# EAGLE board StellarisWF121 (EAGLE 6.4)
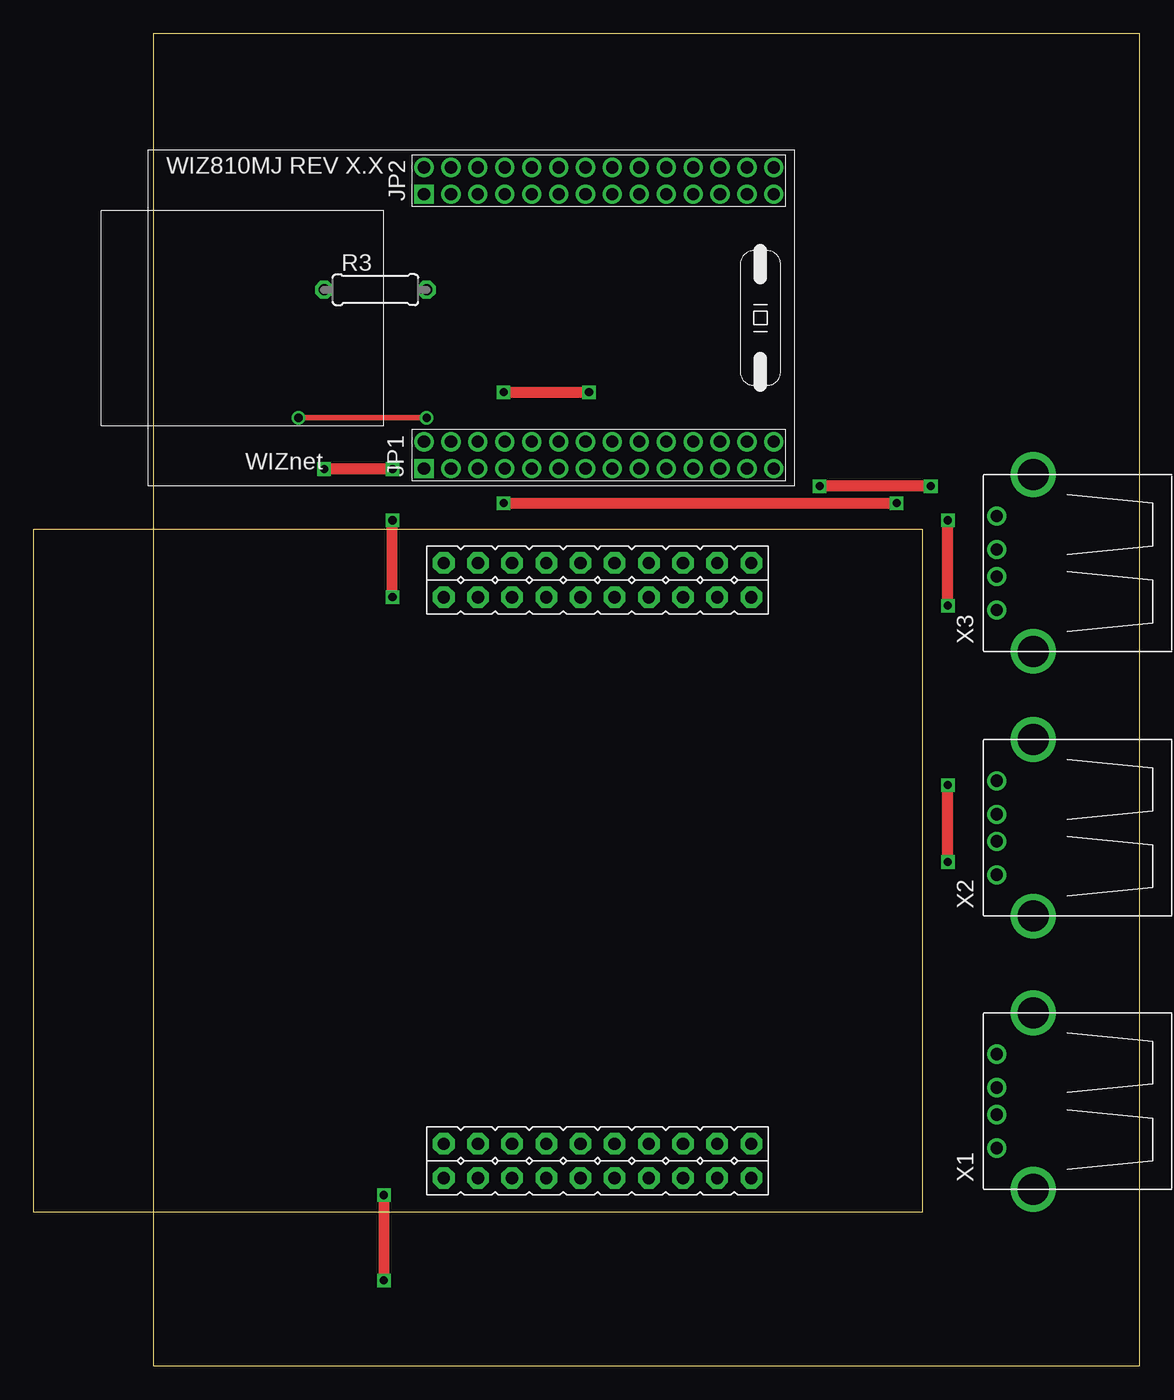
[diagram p0: board, top side]
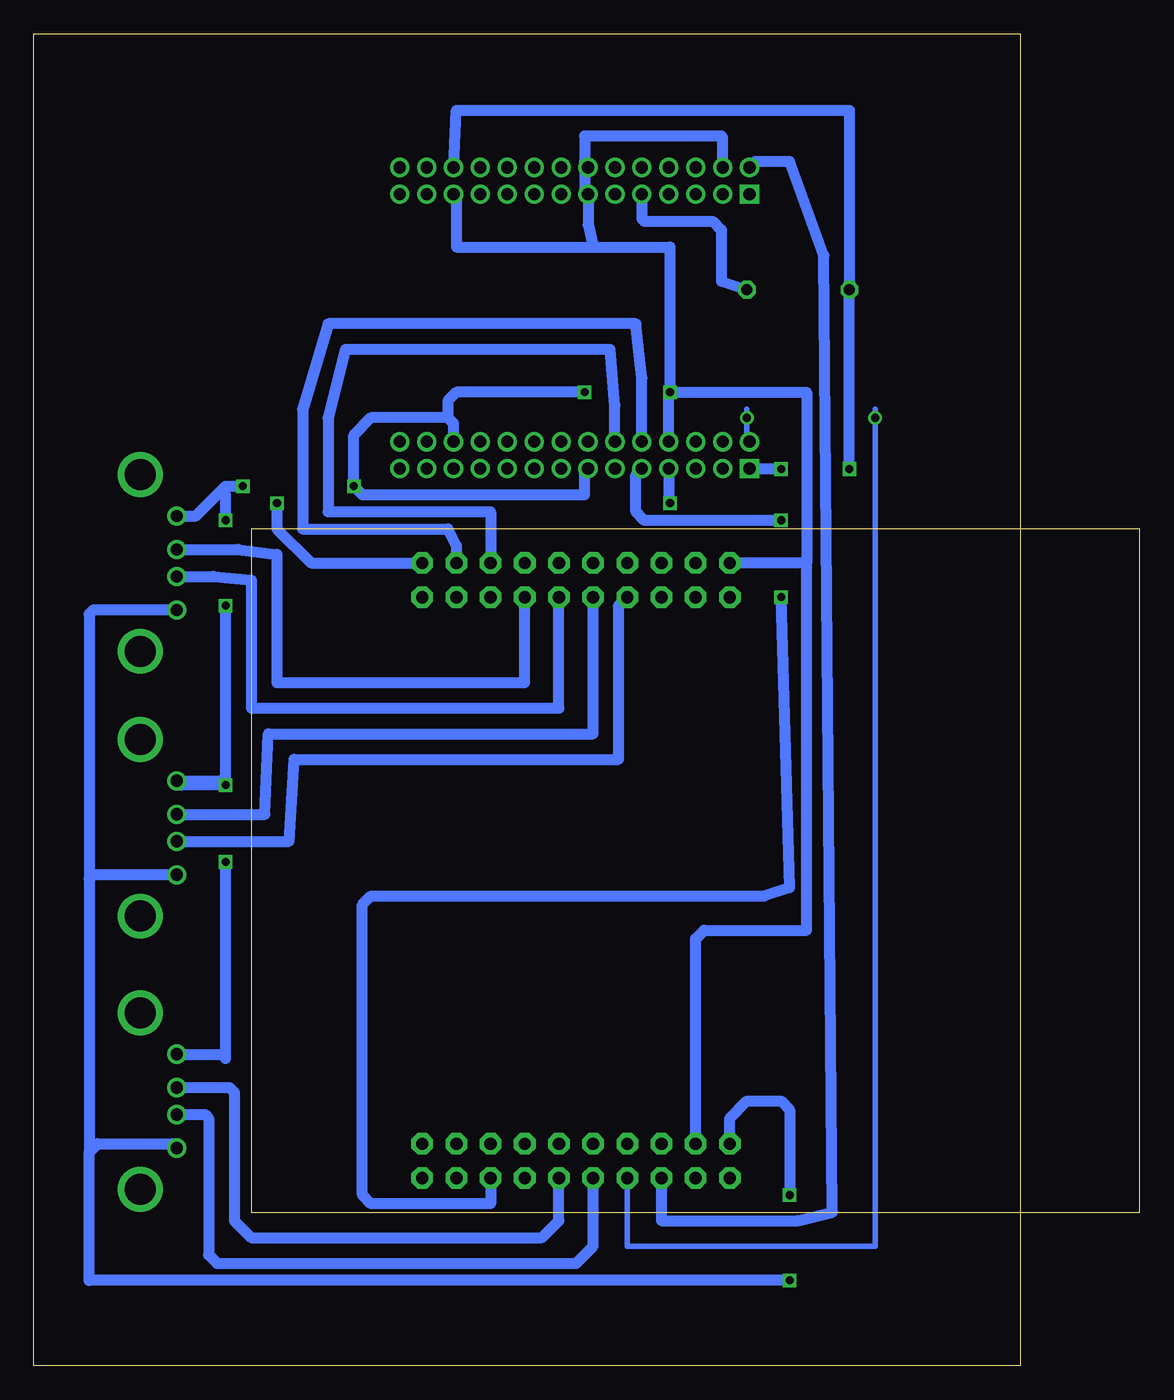
[diagram p1: board, bottom side, seen from below]

Size 73.33 x 99.05 mm. Coordinates in mm from the lower left corner, seen from the top.
Outline: 0,0 73.33,0 73.33,99.05 0,99.05 0,0
Copper layers (1*16): Top 0.035mm / dielectric 1.5mm / Bottom 0.035mm
Design rules "default": minimum track width 10mil, minimum drill 24mil, track to track 8mil, track to pad 8mil, pad to pad 8mil, via to via 8mil, smd to smd 8mil, copper to edge 40mil, drill to drill 8mil, minimum pad ring 10mil, minimum via ring 8mil, stop-mask expansion 4mil, vias tented up to drill 0mil, thermal gap 10mil

## Footprints (pad centres in the part's own frame; a part is rotated, then mirrored left to right if it is on the bottom)
0207/7 = drill 0.813 octagon: 1 -3.81,0; 2 3.81,0
LAUNCHPAD-XL = drill 0.914 pad 1.6 octagon: 3.3V 30.48,2.54; GND1 33.02,5.08; GND2 30.48,48.26; PA2 53.34,48.26; PA3 50.8,48.26; PA4 48.26,48.26; PA5 48.26,2.54; PA6 50.8,2.54; PA7 53.34,2.54; PB0 35.56,2.54; PB1 38.1,2.54; PB2 33.02,48.26; PB3 35.56,45.72; PB4 45.72,2.54; PB5 33.02,2.54; PB6 45.72,48.26; PB7 43.18,48.26; PC4 38.1,45.72; PC5 40.64,45.72; PC6 43.18,45.72; PC7 45.72,45.72; PD0 35.56,5.08; PD1 38.1,5.08; PD2 40.64,5.08; PD3 43.18,5.08; PD6 48.26,45.72; PD7 50.8,45.72; PE0 35.56,48.26; PE1 45.72,5.08; PE2 48.26,5.08; PE3 50.8,5.08; PE4 40.64,2.54; PE5 43.18,2.54; PF0 38.1,48.26; PF1 53.34,5.08; PF2 30.48,45.72; PF3 33.02,45.72; PF4 53.34,45.72; RST 40.64,48.26; VBUS 30.48,5.08
WIZ810MJ = drill 0.9 pad 1.422 square: 1 27.5,-1.3; 29 27.5,-21.7 | drill 0.9 pad 1.422: 2 27.5,-3.3; 3 25.5,-1.3; 4 25.5,-3.3; 5 23.5,-1.3; 6 23.5,-3.3; 7 21.5,-1.3; 8 21.5,-3.3; 9 19.5,-1.3; 10 19.5,-3.3; 11 17.5,-1.3; 12 17.5,-3.3; 13 15.5,-1.3; 14 15.5,-3.3; 15 13.5,-1.3; 16 13.5,-3.3; 17 11.5,-1.3; 18 11.5,-3.3; 19 9.5,-1.3; 20 9.5,-3.3; 21 7.5,-1.3; 22 7.5,-3.3; 23 5.5,-1.3; 24 5.5,-3.3; 25 3.5,-1.3; 26 3.5,-3.3; 27 1.5,-1.3; 28 1.5,-3.3; 30 27.5,-23.7; 31 25.5,-21.7; 32 25.5,-23.7; 33 23.5,-21.7; 34 23.5,-23.7; 35 21.5,-21.7; 36 21.5,-23.7; 37 19.5,-21.7; 38 19.5,-23.7; 39 17.5,-21.7; 40 17.5,-23.7; 41 15.5,-21.7; 42 15.5,-23.7; 43 13.5,-21.7; 44 13.5,-23.7; 45 11.5,-21.7; 46 11.5,-23.7; 47 9.5,-21.7; 48 9.5,-23.7; 49 7.5,-21.7; 50 7.5,-23.7; 51 5.5,-21.7; 52 5.5,-23.7; 53 3.5,-21.7; 54 3.5,-23.7; 55 1.5,-21.7; 56 1.5,-23.7
USB-A-H = drill 0.914: D+ 2.718,-1.003; D- 2.718,1.003; GND 2.718,-3.493; VBUS 2.718,3.493 | drill 2.311: P$5 0,-6.566; P$6 0,6.566

## Placement (x,y rotation side)
R3  [0207/7]  16.51,80.01 0 top
U$1  STELLARIS-LAUNCHPADSTELLARIS-LAUNCHPAD-XL  [LAUNCHPAD-XL]  -8.89,11.43 0 top
U$2  WIZ810MJ  [WIZ810MJ]  47.62,65.41 180 top
X1  [USB-A-H]  65.41,19.69 180 top
X2  [USB-A-H]  65.41,40.01 180 top
X3  [USB-A-H]  65.41,59.69 180 top

## Library data of the parts
R3 = rcl
U$1 X1-X3 = lieven
U$2 = WIZNET

## Nets
3.3V: U$1.3.3V
+5V: U$1.VBUS X1.VBUS X2.VBUS X3.VBUS
GND: U$1.GND1 U$1.GND2 U$2.8 U$2.13 U$2.24 U$2.32 U$2.41 U$2.42 U$2.51 X1.GND X2.GND X3.GND
N$1: U$1.PB0 U$2.30
N$2: U$1.PE5 X1.D+
N$3: U$1.PA2 U$2.7
N$4: U$1.PE4 X1.D-
N$5: U$1.PB1 U$2.2
N$6: U$1.PA5 U$2.9
N$8: U$1.PA4 U$2.12
N$9: U$1.PA3 U$2.10
N$10: R3.2 U$2.37
N$11: U$1.PC4 X2.D-
N$12: U$1.PC5 X2.D+
N$13: U$1.PC6 X3.D-
N$14: U$1.PC7 X3.D+
RST: U$1.RST
VCC: R3.1 U$2.1 U$2.52

## Tracks (layer width: path | path; a pad name or v marks a point on that pad's centre or on a via)
+5V  (via drill 0.6)
  Top 0.813: v17.14,12.7 v17.14,6.35
  Bottom 0.813: U$1.VBUS 21.59,18.41 20.32,19.69 17.78,19.69 17.14,19.05 v17.14,12.7 | v17.14,6.35 69.22,6.35 69.22,15.88 | 69.22,15.88 68.58,16.51 63,16.51 X1.VBUS | X2.VBUS 68.9,36.51 69.22,36.2 | 69.22,36.2 69.22,15.88 | X3.VBUS 68.9,56.2 69.22,55.88 69.22,36.2
GND  (via drill 0.6)
  Top 0.813: v26.04,72.39 v32.39,72.39 | v57.78,65.41 v49.53,65.41 | v59.05,37.47 v59.05,43.18 | v59.05,56.52 v59.05,62.87
  Bottom 0.813: U$2.24 42.12,70.06 42.55,70.48 | 42.55,70.48 48.26,70.48 49.53,69.22 v49.53,65.41 48.89,64.77 32.39,64.77 32.39,66.44 U$2.13 | v26.04,72.39 15.88,72.39 15.88,59.69 | 15.88,59.69 U$1.GND2 | 31.75,83.19 32.12,84.83 U$2.41 32.39,87.36 32.39,89.53 32.12,89.27 U$2.42 32.39,89.36 32.39,91.44 22.23,91.44 22.12,91.34 U$2.32 | 31.75,83.19 26.04,83.19 v26.04,72.39 | U$2.51 42.02,87.1 41.91,86.99 41.91,83.19 31.75,83.19 | U$2.8 26.12,72.3 v26.04,72.39 | v32.39,72.39 41.91,72.39 42.55,71.75 42.55,70.48 | X3.GND 61.28,63.18 59.37,65.09 | 59.37,65.09 59.05,65.41 v57.78,65.41 | U$1.GND1 24.13,31.75 23.5,32.38 15.88,32.38 15.88,59.69 | X1.GND 59.37,23.18 59.05,22.86 v59.05,37.47 | v59.05,43.18 62.37,43.18 X2.GND 59.37,43.5 59.05,43.82 v59.05,56.52 | v59.05,62.87 59.05,64.77 59.37,65.09
N$1
  Bottom 0.813: U$1.PB0 26.67,10.8 16.51,10.8 13.97,11.43 14.61,82.55 17.14,89.53 19.7,89.53 U$2.30
N$2
  Bottom 0.813: X1.D+ 58.79,20.69 58.42,20.32 58.42,10.8 57.15,9.53 35.56,9.53 34.29,10.8 U$1.PE5
N$3  (via drill 0.6)
  Top 0.813: v26.04,64.14 v55.25,64.14
  Bottom 0.813: U$2.7 26.12,64.22 v26.04,64.14 | v55.25,64.14 55.25,62.23 52.7,59.69 U$1.PA2
N$4
  Bottom 0.813: X1.D- 60.59,18.68 60.33,18.41 60.33,8.26 59.69,7.62 33.02,7.62 31.75,8.89 U$1.PE4
N$5  (via drill 0.6)
  Top 0.406: v10.8,70.48 v20.32,70.48
  Bottom 0.406: U$1.PB1 29.21,8.89 10.8,8.89 v10.8,70.48 10.8,71.12 | 20.32,71.12 v20.32,70.48 20.32,69.22 U$2.2
N$6  (via drill 0.6)
  Top 0.813: v17.78,57.15 v17.78,62.87
  Bottom 0.813: U$1.PA5 39.37,12.07 48.26,12.07 48.89,12.7 48.89,34.29 48.26,34.93 19.05,34.93 17.14,35.56 v17.78,57.15 | v17.78,62.87 27.94,62.87 28.57,63.5 28.57,66.25 U$2.9
N$8
  Bottom 0.813: U$2.12 30.13,71.4 30.48,75.56 50.17,75.56 51.44,70.48 51.44,63.5 39.37,63.5 U$1.PA4
N$9
  Bottom 0.813: U$2.10 28.13,73.47 28.57,77.47 51.44,77.47 53.34,71.12 53.34,62.23 42.55,62.23 41.91,60.96 U$1.PA3
N$10
  Bottom 0.813: U$2.37 28.13,85.27 27.94,85.09 22.86,85.09 22.23,84.45 22.23,80.64 R3.2
N$11
  Bottom 0.813: X2.D- 54.34,39 53.97,45.09 29.85,45.09 29.85,56.52 U$1.PC4
N$12
  Bottom 0.813: X2.D+ 56.15,41.01 55.88,46.99 31.75,46.99 U$1.PC5
N$13
  Bottom 0.813: X3.D- 59.96,58.69 57.15,58.42 57.15,48.9 34.29,48.9 U$1.PC6
N$14
  Bottom 0.813: X3.D+ 58.15,60.69 55.25,60.33 55.25,50.8 36.83,50.8 U$1.PC7
VCC  (via drill 0.6)
  Top 0.813: v17.78,66.67 v12.7,66.67
  Bottom 0.813: U$2.52 41.91,93.34 12.7,93.34 R3.1 v12.7,66.67 | U$2.1 17.81,66.7 v17.78,66.67